# Altium PCB Buck_PCB.PcbDoc
Units mm, origin at the board's own origin, x right, y up, seen from the top; angles counter-clockwise.
Board outline 63.63 x 34.8 mm, 2 copper layers (Top Layer, Bottom Layer); 20 components, 13 nets, 64 pads, 9 vias.
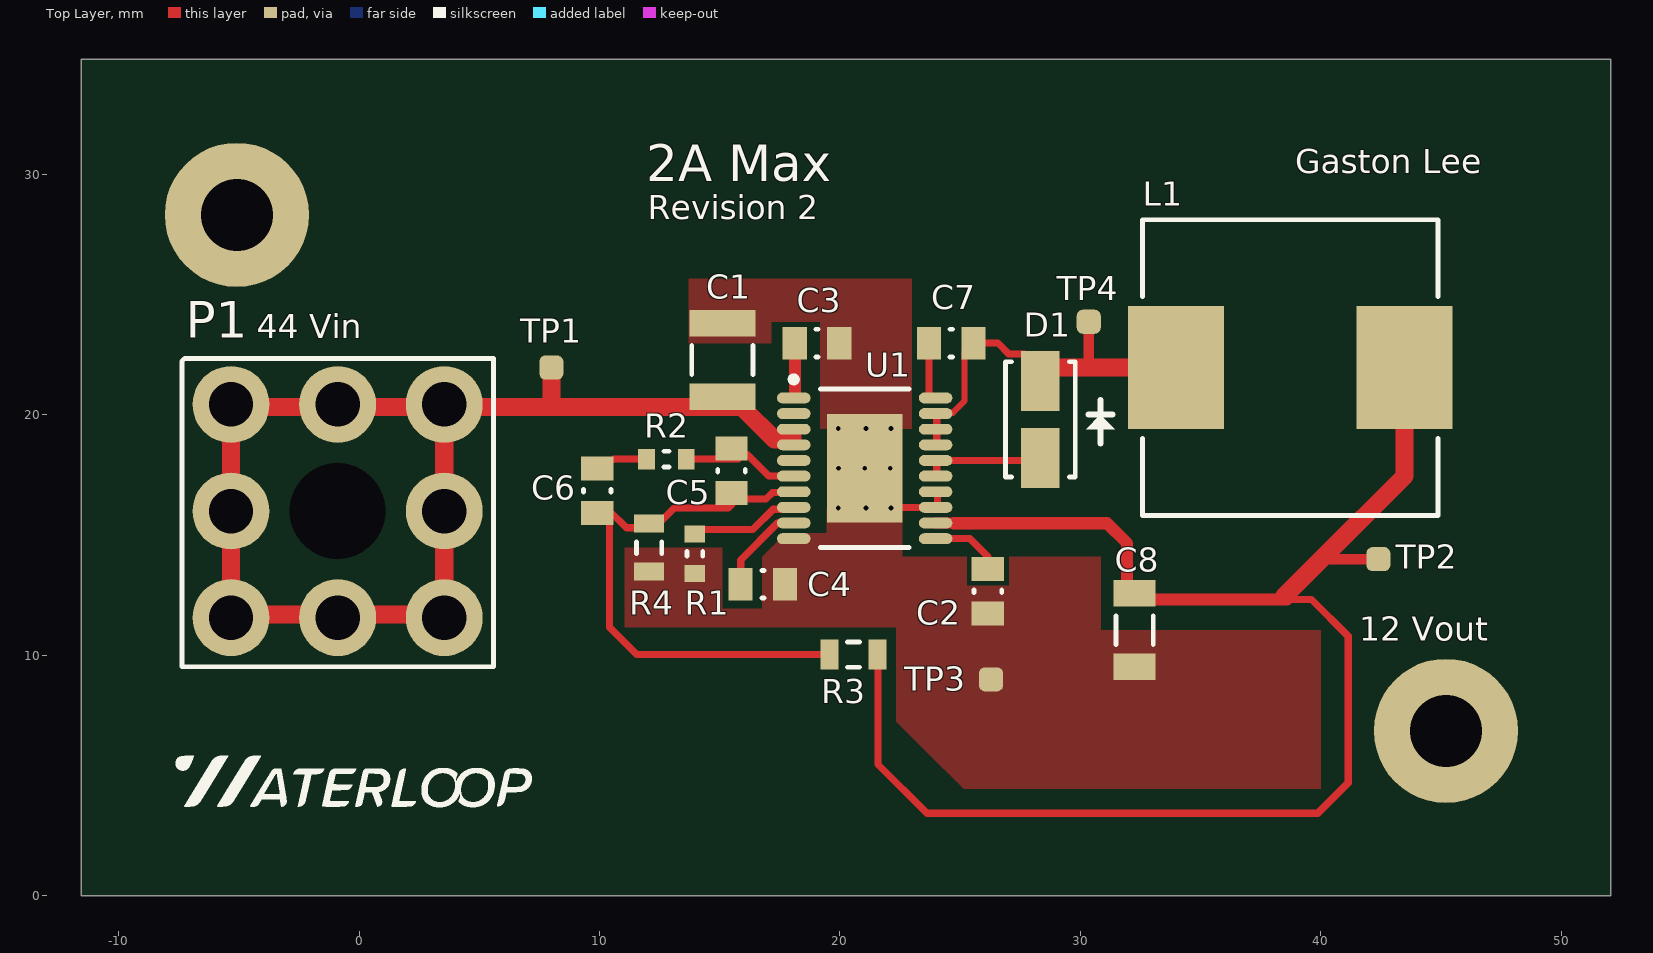
[diagram p0: Top Layer view]
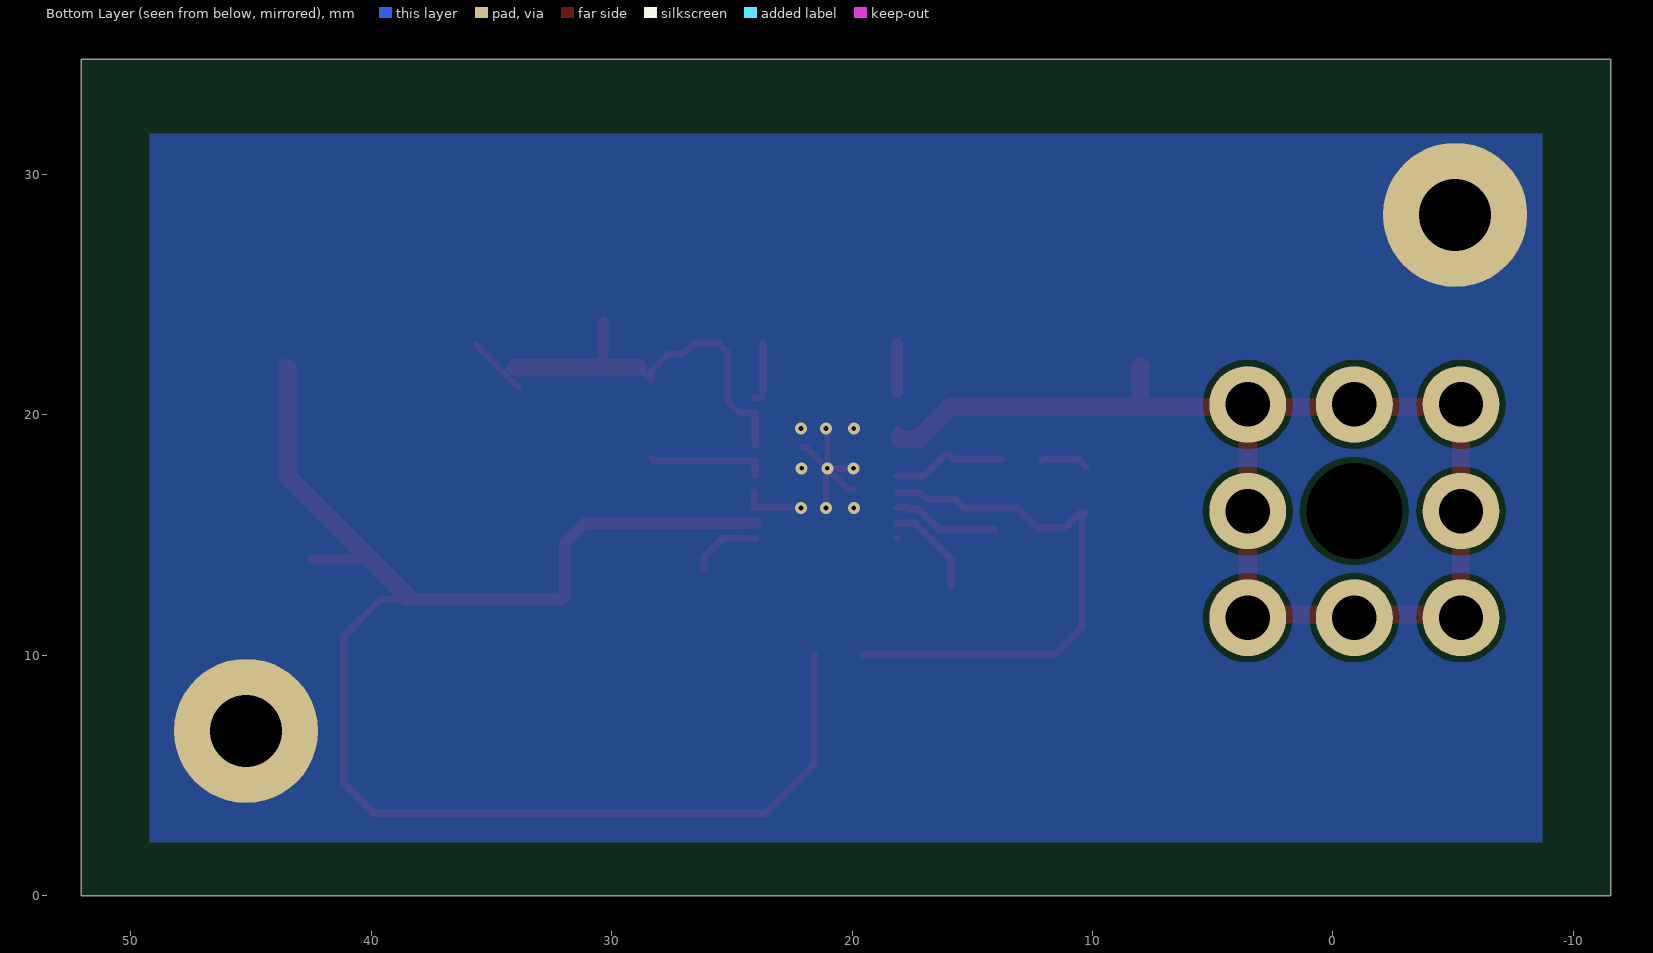
[diagram p1: Bottom Layer view, seen from below]
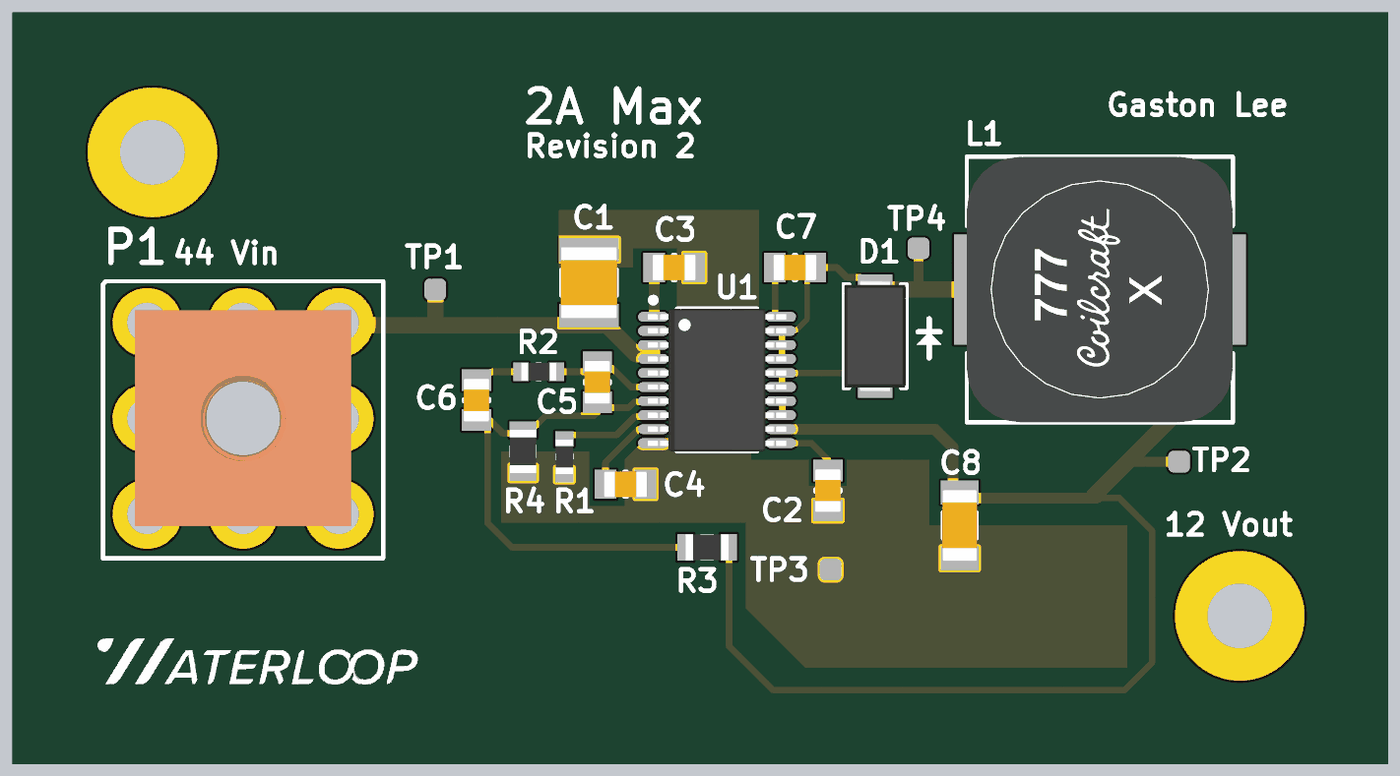
[diagram p2: 3D render of the assembled board from above, using the file's embedded part models]

## Layer stack, top to bottom
Top Solder: solder mask 0.0102, Solder Resist, Dk 3.5
Top Layer: signal copper 0.0356
Dielectric 1: dielectric 0.32, FR-4, Dk 4.8
Bottom Layer: signal copper 0.0356
Bottom Solder: solder mask 0.0102, Solder Resist, Dk 3.5

## Board outline
-11.557,0 52.07,0 52.07,34.798 -11.557,34.798

## Design rules (kind name [scope] priority, off if disabled: settings)
Clearance [All] p1: gap=0.254 ignorepadtopadclearanceinfootprint=FALSE except(0: Arc-Hole Track-Hole SMDPad-Hole THPad-Hole Via-Hole Fill-Hole Poly-Hole Region-Hole Text-Hole; 0.127: Arc-Arc Arc-Track Track-Track SMDPad-SMDPad; 0.2: Arc-SMDPad Track-SMDPad SMDPad-Fill SMDPad-Poly SMDPad-Region)
HoleSize [All] p1: absolutevalues=TRUE maxlimit=3 minlimit=0.025 maxpercent=80.000 minpercent=20.000
PolygonConnect [All] p1: connectstyle=Direct reliefconductorwidth=0.254 reliefentries=4 polygonreliefangle="90 Angle" airgapwidth=0.254
RoomDefinition Buck_Schematic [InComponentClass('Buck_Schematic')] p1: confinementstyle=ConfineIn formatcopy=TRUE lockcomponents=FALSE outline -8.763,2.54 49.53,2.54 49.53,32.131 -8.763,32.131
RoutingVias [All] p1: holewidth=0.5 width=1 viastyle="Through Hole" minholewidth=0.2 minwidth=0.6 maxholewidth=0.711 maxwidth=1.27
SilkToSolderMaskClearance [IsPad] p1: minsilkscreentomaskgap=0.15 clearancetoexposedcopper=TRUE
SolderMaskExpansion [All] p1: expansion=0.102 istentingtop=FALSE
Width [All] p1: maxlimit=0.75 minlimit=0.254 preferedwidth=0.381 toplayer_prefwidth=0.254 bottomlayer_maxwidth=0.381 minimp=50.000000 maximp=50.000000 favimp=50.000000
28 further rules are at their usual default settings.

## Components (designator, comment, footprint, x,y, rotation, side; value= is the part's Value field where it differs from the comment)
C1 "" "1210 - Capacitor" 15.113,22.287 r270 top value=2.2uF
C2 "" "0805 - Capacitor" 26.162,12.664 r90 top value=10nF
C3 "" "0805 - Capacitor" 19.05,22.987 r180 top value=100nF
C4 "" "0805 - Capacitor" 16.801,12.954 r180 top value=690pF
C5 "" "0805 - Capacitor" 15.494,17.678 r90 top value=51pF
C6 "" "0805 - Capacitor" 9.911,16.85 r90 top value=2.7nF
C7 "Cboot" "0805 - Capacitor" 24.638,22.987 r180 top value=22nF
C8 "Capacitor - Nonpolarized" "1206 - Capacitor" 32.258,11.049 r90 top value=47uF
D1 "Diode - Schottky" "SMA - DIODE" 28.342,19.812 r90 top
L1 "Inductor" "MSS1210 - INDUCTOR" 38.735,21.971 r0 top value=68uH
P1 "1x2 Header" 74650094R -0.889,16.002 r0 top
R1 "" "0603 - Resistor" 13.97,14.224 r90 top value=20.5k
R2 "" "0603 - Resistor" 12.79,18.161 r0 top value=21.5k
R3 "" "0805 - Resistor" 20.574,10.033 r0 top value=8.87k
R4 "" "0805 - Resistor" 12.066,14.478 r90 top value=1.02k
TP1 "Test Point" "Test Point"#1 8.001,21.971 r90 top
TP2 "Test Point" "Test Point"#2 41.402,12.954 r90 top
TP3 "Test Point" "Test Point"#1 26.289,9 r90 top
TP4 "Test Point" "Test Point"#1 30.353,23.876 r90 top
U1 "LM5005" LM5005 21.033,17.78 r0 top

## Footprints (in the part's own frame and the unit in brackets; to place one, negate y for a bottom-side part, rotate by r counter-clockwise, add the part's x,y. Pads: shape width x height; smd on the part's side, far side on the other; paste and mask are expansions set on the pad)
"0603 - Resistor" [mm] "0603 Chip Resistor - IPC Medium Density"
  rect 0.7x0.85 smd: 1(-0.825,0) 2(0.825,0)
  silkscreen extent -0.1,-0.33 0.1,0.33, body extent -0.8,-0.4 0.8,0.4, height 0.45
"0805 - Capacitor" [mm] "0805 Chip Capacitor - IPC Medium Density"
  rect 1x1.35 smd: 1(-0.925,0) 2(0.925,0)
  silkscreen extent -0.05,-0.58 0.05,0.58, body extent -1,-0.6 1,0.6, height 1.2
"0805 - Resistor" [mm] "0805 Chip Resistor - IPC Medium Density"
  rect 0.75x1.25 smd: 1(-1,0) 2(1,0)
  silkscreen extent -0.25,-0.53 0.25,0.53, body extent -1,-0.6 1,0.6, height 0.5
"1206 - Capacitor" [mm] "1206 Chip Capacitor - IPC Medium Density"
  rect 1.1x1.75 smd: 1(-1.525,0) 2(1.525,0)
  silkscreen extent -0.6,-0.77 0.6,0.77, body extent -1.65,-0.8 1.65,0.8, height 1.6
"1210 - Capacitor" [mm] "1210 Chip Capacitor - IPC Medium Density"
  rect 1.1x2.75 smd: 1(-1.525,0) 2(1.525,0)
  silkscreen extent -0.6,-1.27 0.6,1.28, body extent -1.65,-1.3 1.65,1.3, height 1.6
74650094R [mm] "M4 High Current Terminal Block"
  round 3.2 hole 1.85: 1(-4.435,-4.435) 1(-4.435,0) 1(-4.435,4.435) 1(0,-4.435) 1(0,4.435) 1(4.435,-4.435) 1(4.435,0) 1(4.435,4.435)
  round 1.524 hole 4 unplated: 18(0,0)
  silkscreen extent -6.48,-6.48 6.48,6.35, body extent -5,-5 5,5, height 3
LM5005 [mm] "20-PowerTSSOP (0.173\"\", 4.40mm Width)"
  oval 1.4x0.45 smd: 1(-2.95,2.925) 2(-2.95,2.275) 3(-2.95,1.625) 4(-2.95,0.975) 5(-2.95,0.325) 6(-2.95,-0.325) 7(-2.95,-0.975) 8(-2.95,-1.625) 9(-2.95,-2.275) 10(-2.95,-2.925) 11(2.95,-2.925) 12(2.95,-2.275) 13(2.95,-1.625) 14(2.95,-0.975) 15(2.95,-0.325) 16(2.95,0.325) 17(2.95,0.975) 18(2.95,1.625) 19(2.95,2.275) 20(2.95,2.925)
  rect 3.15x4.5 smd: 21(0,0)
  silkscreen extent -3.07,-3.3 1.85,3.82, body extent -3.2,-3.3 3.2,3.3, height 1.1
"MSS1210 - INDUCTOR" [mm] "Precision Wire Wound Inductor, 2-Leads, Body 12.00x12.00mm, IPC Medium Density"
  rect 4x5.1 smd: 1(-4.75,0) 2(4.75,0)
  silkscreen extent -6.15,-6.15 6.15,6.15, body extent -6.15,-6.15 6.15,6.15, height 10.16
"SMA - DIODE" [mm] "Molded Diode, 2-Leads, Body 4.38x2.63mm, IPC Medium Density"
  rect 2.5x1.6 smd: 1(-1.6,0) 2(1.6,0)
  silkscreen extent -2.4,-3.1 2.4,1.45, body extent -2.6,-1.43 2.6,1.43, height 2.95
"Test Point"#1 [mm] "Test Point"
  rrect50% 1x1 smd: TP?(0,0)
"Test Point"#2 [mm] "Test Point"
  rrect50% 1x1 smd: TP?(1.046,-1)

## Part data
C1 C2 C3 C4 C5 C6 C7: library part "Capacitor - Nonpolarized", "Nonpolarized Capacitor", Supplier 1=Digi-Key
C8: "Nonpolarized Capacitor"
D1: "Schottky Rectifier", ComponentLink1Description="Manufacturer Link", ComponentLink1URL=http://www.irf.com/, ComponentLink2Description=Datasheet, ComponentLink2URL=http://www.irf.com/product-info/datasheets/data/10tq.pdf, Supplier 1=Digi-Key
P1: library part 74650094R
R1 R2 R3 R4: library part Resistor, "Resistor", Supplier 1=Digi-Key
U1: "7V to 75V 2.5A, Buck Converter", Manufacturer="Texas Instruments", Manufacturer Part Number=LM5005MHX/NOPB, Supplier Part Number=926-LM5005MHX/NOPB, Datasheet=https://www.ti.com/lit/ds/symlink/lm5005.pdf?HQS=TI-null-null-digikeymode-df-pf-null-wwe&ts=1606456124909, Supplier=Mouser, Supplier 1=Digi-Key
L1: Supplier 1=Mouser

## Free pads (board coordinates)
  round 6 hole 3: 1(-5.08,28.321) 2(45.212,6.858)

## Via types
v1: diameter 0.5, hole 0.2, Top Layer to Bottom Layer, 9 vias

## Nets (pads, with @x,y where several pads share a name; then routed paths per layer and width w, separated by ;. In a path a pad name is that pad's centre, name@x,y a point inside that pad or via, vN(x,y) a via of type N, cw(c..) or ccw(c..) an arc to the next point about the centre after c; other vN are vias at no path point)
12V: C8.2 L1.2 R3.2 TP2.TP? U1.12 | length 66.2
  Top Layer w0.254: C8.2@32.004,12.404 C8.2@32.089,12.319
  Top Layer w0.3: R3.2 21.59,10.017 21.59,5.461 23.622,3.429 39.878,3.429 41.148,4.699 41.148,10.795 39.624,12.319 38.608,12.319 38.33,12.319
  Top Layer w0.45: U1.12 24.458,15.505 24.727,15.505 24.738,15.494 ; 40.132,14 TP2.TP?
  Top Layer w0.5: 24.738,15.494 31.115,15.494 31.948,14.661 31.948,12.46 C8.2@32.004,12.404 ; C8.2@32.089,12.319 38.33,12.319 38.608,12.319
  Top Layer w0.75: 38.481,12.446 40.084,14.049 43.485,17.45 L1.2
GND: C1.1 C2.1 C3.1 C4.1 C8.1 pad.1 pad.2 R1.1 R4.1 TP3.TP? U1.10 U1.13 U1.14 U1.21 | length 9.5
  Top Layer w0.254: U1.10@18.132,14.855 U1.10@18.17,14.893 ; U1.21@19.939,16.891 20.144,16.891 v1(21.033,17.78) ; v1(19.939,17.78) v1(21.033,17.78) ; v1(21.082,16.129) 21.082,17.731 v1(21.033,17.78) ; v1(21.082,19.431) 21.033,19.382 v1(21.033,17.78) ; U1.21@22.098,18.669 21.922,18.669 v1(21.033,17.78)
  Top Layer w0.3: U1.21@22.555,16.155 24.057,16.155 U1.14@24.057,16.805
  other v1: 19.933,16.13 22.133,16.13 22.098,17.78 19.933,19.43 22.133,19.43
NetC1_2: C1.2 P1.1 TP1.TP? U1.3 U1.4 | length 52.3
  Top Layer w0.254: TP1.TP? TP1.TP?@8.001,22.038 ; U1.3@18.094,19.443 U1.3@18.132,19.405
  Top Layer w0.75: P1.1@-5.324,11.43 P1.1@-5.324,11.694 ; P1.1@3.546,11.303 P1.1@3.546,11.694 ; P1.1@3.546,20.193 P1.1@3.546,11.694 ; 8.001,20.447 TP1.TP?@8.001,22.004 ; 18.034,19.05 17.964,18.98 17.277,18.98 15.937,20.32 3.546,20.32 -5.324,20.32 P1.1@-5.324,11.694 ; P1.1@-5.324,11.694 -0.889,11.694 P1.1@3.546,11.694
NetC2_2: C2.2 U1.11 | length 3
  Top Layer w0.3: U1.11 25.4,14.855 ; 25.4,14.859 26.162,14.097 C2.2
NetC3_2: C3.2 U1.1 | length 2
  Top Layer w0.254: C3.2 C3.2@18.132,22.98
  Top Layer w0.5: 18.132,20.955 C3.2@18.132,22.98
NetC4_2: C4.2 U1.9 | length 4.6
  Top Layer w0.254: U1.9@17.629,15.505 U1.9@18.157,15.505
  Top Layer w0.3: C4.2@15.875,12.863 15.875,13.97 17.399,15.494 17.629,15.494 18.146,15.494 U1.9@18.157,15.505
NetC5_1: C5.1 C6.1 R3.1 R4.2 U1.7 | length 23.2
  Top Layer w0.254: C6.1@10.287,15.966 C6.1@10.462,15.966 ; R4.2@12.216,15.303 R4.2@12.291,15.303 ; C5.1@15.725,16.499 C5.1@15.978,16.499
  Top Layer w0.3: C6.1@10.25,15.966 10.414,15.802 10.414,11.176 11.557,10.033 R3.1 ; C6.1@10.462,15.966 11.125,15.303 R4.2@12.216,15.303 ; R4.2@12.291,15.303 13.117,16.129 15.355,16.129 C5.1@15.725,16.499 ; C5.1@15.978,16.499 16.931,16.499 17.199,16.767 U1.7@18.094,16.767
NetC5_2: C5.2 R2.2 U1.6 | length 4.9
  Top Layer w0.254: C5.2@15.789,18.161 15.978,18.349 C5.2@16.153,18.349 ; U1.6@18.094,17.493 18.132,17.455 U1.6@18.157,17.455
  Top Layer w0.3: R2.2@13.779,18.161 C5.2@15.789,18.161 ; C5.2@16.153,18.349 17.047,17.455 U1.6@18.132,17.455
NetC6_2: C6.2 R2.1 | length 2.2
  Top Layer w0.254: C6.2@10.378,17.907 10.287,17.816 10.25,17.816 10.595,18.161 ; R2.1@12.054,18.161 R2.1@12.129,18.086
  Top Layer w0.3: 10.595,18.161 R2.1@12.054,18.161
NetC7_1: C7.1 D1.2 L1.1 TP4.TP? U1.17 U1.18 U1.19 | length 20.5
  Top Layer w0.254: U1.19@24.057,20.055 24.094,20.093 24.7,20.093 25.19,20.583 25.19,22.614 C7.1 ; D1.2@27.669,22.535 28.342,21.862 D1.2 D1.2@28.901,21.971 ; L1.1@33.89,21.158 L1.1@35.636,22.904
  Top Layer w0.3: U1.18@24.028,19.39 U1.19@24.028,20.04 ; U1.17@24.032,18.755 24.032,20.055 U1.18@24.032,19.39 ; C7.1 26.577,22.987 27.029,22.535 D1.2@27.669,22.535
  Top Layer w0.45: 30.353,21.971 TP4.TP?
  Top Layer w0.75: D1.2@28.901,21.971 30.353,21.971 L1.1
NetC7_2: C7.2 U1.20 | length 2.6
  Top Layer w0.254: U1.20@23.713,20.796 23.804,20.705 U1.20@24.057,20.705
  Top Layer w0.3: U1.20@23.713,20.796 C7.2
NetD1_1: D1.1 U1.15 U1.16 | length 5
  Top Layer w0.254: D1.1@28.235,18.105 D1.1
  Top Layer w0.3: U1.15@24.032,17.455 U1.16@24.032,18.105 ; U1.16@24.057,18.105 D1.1@28.235,18.105
NetR1_2: R1.2 U1.8 | length 4.4
  Top Layer w0.3: R1.2@14.086,15.24 16.388,15.24 17.228,16.08 17.566,16.08 17.641,16.155 U1.8@18.157,16.155
pads on no net: P1.18 U1.2 U1.5

## Polygon pours and split planes (outlines as drawn)
GND on Top Layer "GND_L01_P004" (solid, pour order 4): 13.716,22.987 13.716,25.654 22.987,25.654 22.987,19.431 19.177,19.431 19.177,23.876 17.145,23.876 17.145,22.987
GND on Top Layer "GND_L01_P007" (solid, pour order 7): 11.049,14.478 15.113,14.478 15.113,11.938 16.764,11.938 16.764,14.097 17.272,14.605 17.746,15.079 19.458,15.079 19.458,16.129 22.606,16.129 22.606,11.176 11.049,11.176
GND on Top Layer "GND_L01_P013" (solid, pour order 13): 22.352,14.097 22.352,7.239 23.495,6.096 25.146,4.445 40.005,4.445 40.005,11.049 30.861,11.049 30.861,14.097
GND on Bottom Layer "GND_L02_P001" (solid, pour order 1): -8.696,31.69 -8.696,2.226 49.216,2.226 49.216,31.69

## Silkscreen, mask and mechanical layers (free items; w line width, h text height)
Top Overlay:
  drawing of 10 lines, arcs and shapes, not listed
  text "Gaston Lee" at 38.935,30.045 h1
  text "2A Max" at 11.938,29.718 h1.52
  text "Revision 2" at 12.011,28.14 h1
  text "44 Vin" at -4.245,23.187 h1
  text "12 Vout" at 41.602,10.614 h1
Mechanical 1:
  lines w1.2: -10.795,0.635 -10.795,34.163 51.435,34.163 51.435,0.635 -10.795,0.635